# Altium PCB PCB2.PcbDoc
Units mil, origin at the board's own origin, x right, y up, seen from the top; angles counter-clockwise.
Board outline 6000 x 4000 mil, 2 copper layers (Top Layer, Bottom Layer); 19 components, 20 nets, 137 pads, 0 vias.
Unrouted connection lines stored in the file: 37.
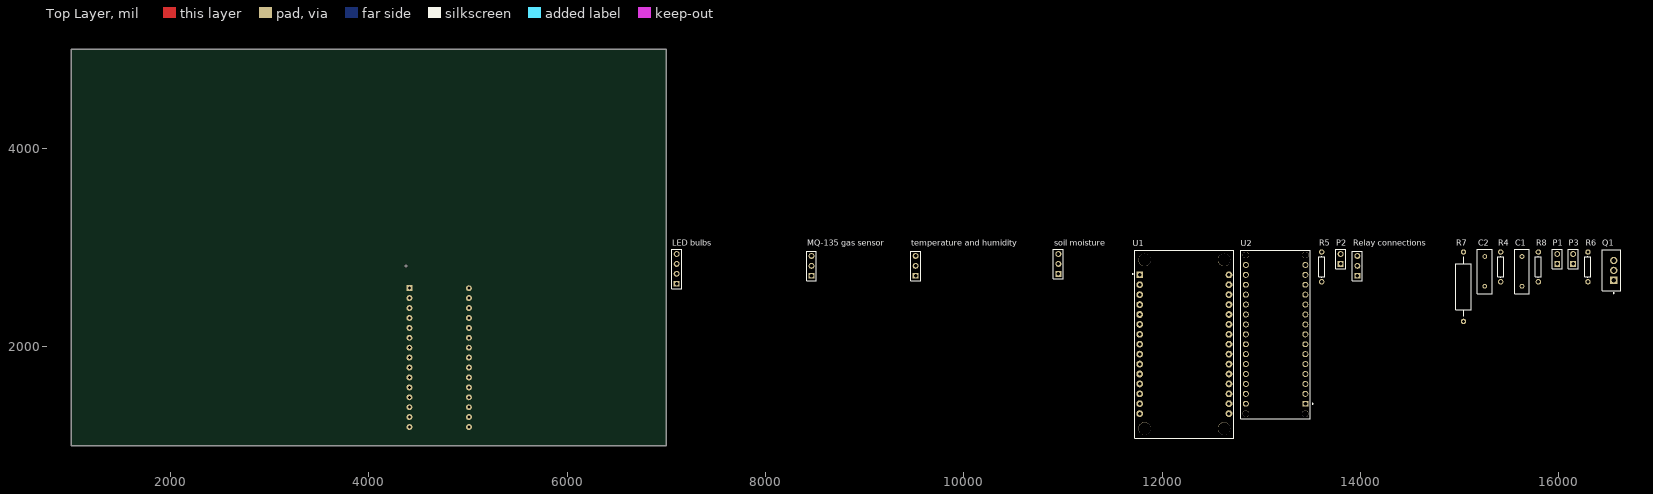
[diagram p0: Top Layer view]
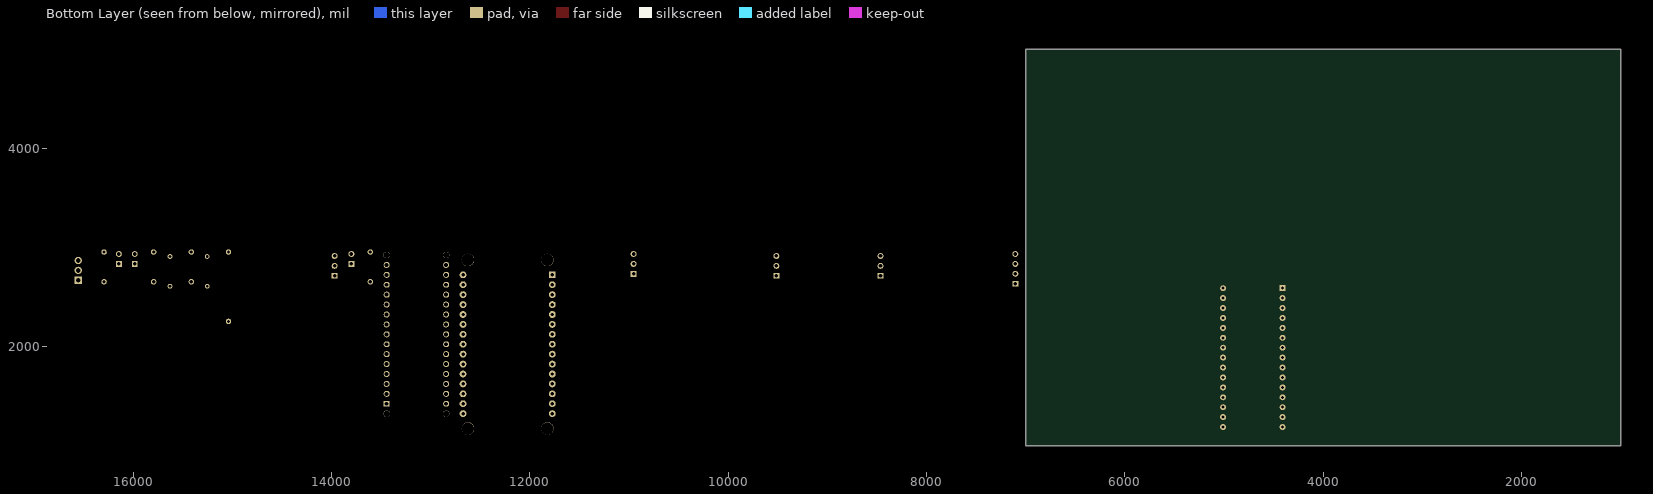
[diagram p1: Bottom Layer view, seen from below]

## Layer stack, top to bottom
Top Solder: solder mask 0.4, Solder Resist, Dk 3.5
Top Layer: signal copper 1.4
Dielectric 1: dielectric 12.6, FR-4, Dk 4.8
Bottom Layer: signal copper 1.4
Bottom Solder: solder mask 0.4, Solder Resist, Dk 3.5

## Board outline
1000,1000 7000,1000 7000,5000 1000,5000

## Design rules (kind name [scope] priority, off if disabled: settings)
Clearance [All] p1: gap=10 ignorepadtopadclearanceinfootprint=FALSE except(0: Arc-Hole Track-Hole SMDPad-Hole THPad-Hole Via-Hole Fill-Hole Poly-Hole Region-Hole Text-Hole)
PolygonConnect [All] p1: connectstyle=Relief reliefconductorwidth=10 reliefentries=4 polygonreliefangle="90 Angle" airgapwidth=10
RoomDefinition Sheet2 [InComponentClass('Sheet2')] p1: confinementstyle=ConfineIn formatcopy=TRUE lockcomponents=FALSE outline 7045,1055 16645,1055 16645,3095 7045,3095
RoutingVias [All] p1: holewidth=28 width=50 viastyle="Through Hole" minholewidth=28 minwidth=50 maxholewidth=28 maxwidth=50
SolderMaskExpansion [All] p1: expansion=4
Width [All] p1: maxlimit=10 minlimit=10 preferedwidth=10
30 further rules are at their usual default settings.

## Components (designator, comment, footprint, x,y, rotation, side; value= is the part's Value field where it differs from the comment)
* "arduinoNano" "Arduino nano" 4350,2750 r270 top
C1 "Cap" RAD-0.3 15630,2760 r90 top value=0.33uF
C2 "Cap" RAD-0.3 15255,2760 r90 top value=0.1uF
"LED bulbs" "Header 4" HDR1X4 7105,2635 r90 top
"MQ-135 gas sensor" "Header 3" HDR1X3 8465,2715 r90 top
P1 "Header 2" HDR1X2 15985,2835 r90 top
P2 "Header 2" HDR1X2 13800,2835 r90 top
P3 "Header 2" HDR1X2 16145,2835 r90 top
Q1 "LM7805CT/NOPB" TO254P1054X470X2600-3 16555,2670 r90 top
R4 "Res1" AXIAL-0.3 15415,2805 r90 top value=1K
R5 "Res1" AXIAL-0.3 13610,2805 r90 top value=1K
R6 "Res1" AXIAL-0.3 16295,2805 r90 top value=1K
R7 "Res Adj1" AXIAL-0.7 15040,2605 r90 top value=1K
R8 "Res1" AXIAL-0.3 15795,2805 r90 top value=1K
"Relay connections" "Header 3" HDR1X3 13970,2715 r90 top
"soil moisture" "Header 3" HDR1X3 10955,2735 r90 top
"temperature and humidity" "Header 3" HDR1X3 9515,2715 r90 top
U1 "ZC563900" MODULE_ZC563900 12225,2025 r0 top
U2 "ABX00028" MODULE_ABX00028 13145,2125 r90 top

## Footprints (in the part's own frame and the unit in brackets; to place one, negate y for a bottom-side part, rotate by r counter-clockwise, add the part's x,y. Pads: shape width x height; smd on the part's side, far side on the other; paste and mask are expansions set on the pad)
"Arduino nano" [mil] "arduino nano"
  rect 60x60 hole 30: 0(160,60)
  round 60 hole 30: 1(260,60) 2(360,60) 3(460,60) 4(560,60) 5(660,60) 6(760,60) 7(860,60) 8(960,60) 9(1060,60) 10(1160,60) 11(1260,60) 12(1360,60) 13(1460,60) 14(1560,60) 15(1560,660) 16(1460,660) 17(1360,660) 18(1260,660) 19(1160,660) 20(1060,660) 21(960,660) 22(860,660) 23(760,660) 24(660,660) 25(560,660) 26(460,660) 27(360,660) 28(260,660) 29(160,660)
AXIAL-0.3 [mm] "Axial Device, Thru-Hole; 2 Leads; 0.3 in Pin Spacing"
  round 1.4 hole 0.85: 1(-3.81,0) 2(3.81,0)
  silkscreen extent -2.77,-0.76 2.77,0.76
AXIAL-0.7 [mm] "Axial Device, Thru-Hole; 2 Leads; 0.7 in Pin Spacing"
  round 1.4 hole 0.85: 1(-8.89,0) 2(8.89,0)
  silkscreen extent -7.62,-2.03 7.62,2.03
HDR1X2 [mm] "Connector; Header; 2 Position"
  rect 1.5x1.5 hole 0.9: 1(0,0)
  round 1.5 hole 0.9: 2(2.54,0)
  silkscreen extent -1.27,-1.27 3.81,1.27
HDR1X3 [mm] "Connector; Header; 3 Position"
  rect 1.5x1.5 hole 0.9: 1(0,0)
  round 1.5 hole 0.9: 2(2.54,0) 3(5.08,0)
  silkscreen extent -1.27,-1.27 6.35,1.27
HDR1X4 [mm] "Connector; Header; 4 Position"
  rect 1.5x1.5 hole 0.9: 1(0,0)
  round 1.5 hole 0.9: 2(2.54,0) 3(5.08,0) 4(7.62,0)
  silkscreen extent -1.27,-1.27 8.89,1.27
MODULE_ABX00028 [mil]
  rect 60x60 hole 40: 1(-700,-300)
  round 60 hole 40: 2(-600,-300) 3(-500,-300) 4(-400,-300) 5(-300,-300) 6(-200,-300) 7(-100,-300) 8(0,-300) 9(100,-300) 10(200,-300) 11(300,-300) 12(400,-300) 13(500,-300) 14(600,-300) 15(700,-300) 16(700,300) 17(600,300) 18(500,300) 19(400,300) 20(300,300) 21(200,300) 22(100,300) 23(0,300) 24(-100,300) 25(-200,300) 26(-300,300) 27(-400,300) 28(-500,300) 29(-600,300) 30(-700,300)
  round 65 hole 65 unplated: ""(-800,-300) ""(-800,300) ""(800,-300) ""(800,300)
  silkscreen extent -850,-378 850,350
MODULE_ZC563900 [mil]
  rect 69x69 hole 35: 1(-450,700)
  round 69 hole 35: 2(-450,600) 3(-450,500) 4(-450,400) 5(-450,300) 6(-450,200) 7(-450,100) 8(-450,0) 9(-450,-100) 10(-450,-200) 11(-450,-300) 12(-450,-400) 13(-450,-500) 14(-450,-600) 15(-450,-700) 16(450,-700) 17(450,-600) 18(450,-500) 19(450,-400) 20(450,-300) 21(450,-200) 22(450,-100) 23(450,0) 24(450,100) 25(450,200) 26(450,300) 27(450,400) 28(450,500) 29(450,600) 30(450,700)
  round 125.98 hole 125.98 unplated: ""(-400,-850) ""(-400,850) ""(400,-850) ""(400,850)
  silkscreen extent -526,-950 500,950
RAD-0.3 [mm] "Radial Cap, Thru-Hole; 2 Leads; 0.3 in Pin Spacing"
  round 1.2 hole 0.7: 1(-3.81,0) 2(3.81,0)
  silkscreen extent -5.71,-1.91 5.71,1.91
TO254P1054X470X2600-3 [mm]
  rect 1.86x1.86 hole 1.24: 1(0,0)
  round 1.86 hole 1.24: 2(2.54,0) 3(5.08,0)
  silkscreen extent -3.41,-1.8 7.81,2.9

## Part data
C1 C2: "Capacitor", LatestRevisionDate=17-Jul-2002, LatestRevisionNote="Re-released for DXP Platform.", PackageDescription="Radial Cap, Thru-Hole; 2 Leads; 0.3 in Pin Spacing", PackageReference=RAD-0.3, Published=8-Jun-2000, Publisher="Altium Limited"
"LED bulbs": "Header, 4-Pin", LatestRevisionDate=17-Jul-2002, LatestRevisionNote="Re-released for DXP Platform.", Publisher="Altium Limited"
"MQ-135 gas sensor" "Relay connections" "soil moisture" "temperature and humidity": "Header, 3-Pin", LatestRevisionDate=17-Jul-2002, LatestRevisionNote="Re-released for DXP Platform.", Publisher="Altium Limited"
P1 P2 P3: "Header, 2-Pin", LatestRevisionDate=17-Jul-2002, LatestRevisionNote="Re-released for DXP Platform.", Publisher="Altium Limited"
Q1: "Linear Voltage Regulator IC 1 Output 1A TO-220-3", Package="TO-220 ON Semiconductor", Availability=Unavailable, MF="ON Semiconductor", MP=LM7805CT, Price=None, SnapEDA_Link=https://www.snapeda.com/parts/LM7805CT/ON%20Semiconductor/view-part/546231/?ref=snap
R4 R5 R6 R8: "Resistor", LatestRevisionDate=17-Jul-2002, LatestRevisionNote="Re-released for DXP Platform.", PackageDescription="Axial Device, Thru-Hole; 2 Leads; 0.3 in Pin Spacing", PackageReference=AXIAL-0.3, Published=8-Jun-2000, Publisher="Altium Limited"
R7: "Variable Resistor", LatestRevisionDate=17-Jul-2002, LatestRevisionNote="Re-released for DXP Platform.", PackageDescription="Axial Device, Thru-Hole; 2 Leads; 0.7 in Pin Spacing", PackageReference=AXIAL-0.7, Published=8-Jun-2000, Publisher="Altium Limited", Set Position=0.5
U1: "NodeMcu Lua ESP8266 WIFI Internet of Things Network Development Module Board", Package=None, Availability=Unavailable, MF=YKS, MP=ZC563900, Price=None, SnapEDA_Link=https://www.snapeda.com/parts/ZC563900/YKS/view-part/607853/?ref=snap
U2: "ATmega4809 Arduino Nano Every AVR® AVR MCU 8-Bit Embedded Evaluation Board", Package=None, Availability=Warning, Check_prices=https://www.snapeda.com/parts/ABX00028/Arduino/view-part/3656170/?ref=eda, MF=Arduino, MP=ABX00028, Price=None, Purchase-URL=https://pricing.snapeda.com/search/part/ABX00028/?ref=eda, SnapEDA_Link=https://www.snapeda.com/parts/ABX00028/Arduino/view-part/3656170/?ref=snap

## Nets (pads, with @x,y where several pads share a name; then routed paths per layer and width w, separated by ;. In a path a pad name is that pad's centre, name@x,y a point inside that pad or via, vN(x,y) a via of type N, cw(c..) or ccw(c..) an arc to the next point about the centre after c; other vN are vias at no path point)
GND: C1.1 C2.1 P1.1 P2.2 Q1.2 R7.1
Net*_25: *.25 U1.24
NetC1_2: C1.2 P1.2 Q1.1 R4.2
NetC2_2: C2.2 Q1.3 R6.1
"NetLED bulbs_1": "LED bulbs.1" U2.23
"NetLED bulbs_2": "LED bulbs.2" U2.24
"NetLED bulbs_3": "LED bulbs.3" U2.25
"NetLED bulbs_4": "LED bulbs.4" U2.19
"NetMQ-135 gas sensor_1": "MQ-135 gas sensor.1" "Relay connections.3" "soil moisture.3" "temperature and humidity.1" U2.14
"NetMQ-135 gas sensor_2": "MQ-135 gas sensor.2" "soil moisture.2" "temperature and humidity.2" U2.12
"NetMQ-135 gas sensor_3": "MQ-135 gas sensor.3" U2.5
NetP2_1: "Relay connections.1" P2.1 P3.1 R5.2 R6.2 R8.2
NetP3_2: P3.2 R7.2 R8.1
NetR4_1: R4.1 U2.15
NetR5_1: R5.1 U1.15
"NetRelay connections_2": "Relay connections.2" U2.7
"Netsoil moisture_1": "soil moisture.1" U2.6
"Nettemperature and humidity_3": "temperature and humidity.3" U2.26
NetU1_18: U1.18 U2.17
NetU1_19: U1.19 U2.16
pads on no net: *.0 *.1 *.2 *.3 *.4 *.5 *.6 *.7 *.8 *.9 *.10 *.11 *.12 *.13 *.14 *.15 *.16 *.17 *.18 *.19 *.20 *.21 *.22 *.23 *.24 *.26 *.27 *.28 *.29 U1. U1.1 U1.2 U1.3 U1.4 U1.5 U1.6 U1.7 U1.8 U1.9 U1.10 U1.11 U1.12 U1.13 U1.14 U1.16 U1.17 U1.20 U1.21 U1.22 U1.23 U1.25 U1.26 U1.27 U1.28 U1.29 U1.30 U2. U2.1 U2.2 U2.3 U2.4 U2.8 U2.9 U2.10 U2.11 U2.13 U2.18 U2.20 U2.21 U2.22 U2.27 U2.28 U2.29 U2.30